# Altium PCB smart home.PcbDoc
Units mm, origin at the board's own origin, x right, y up, seen from the top; angles counter-clockwise.
Board outline 151 x 86.38 mm, 2 copper layers (Top Layer, Bottom Layer); 21 components, 12 nets, 57 pads, 0 vias.
Unrouted connection lines stored in the file: 2.
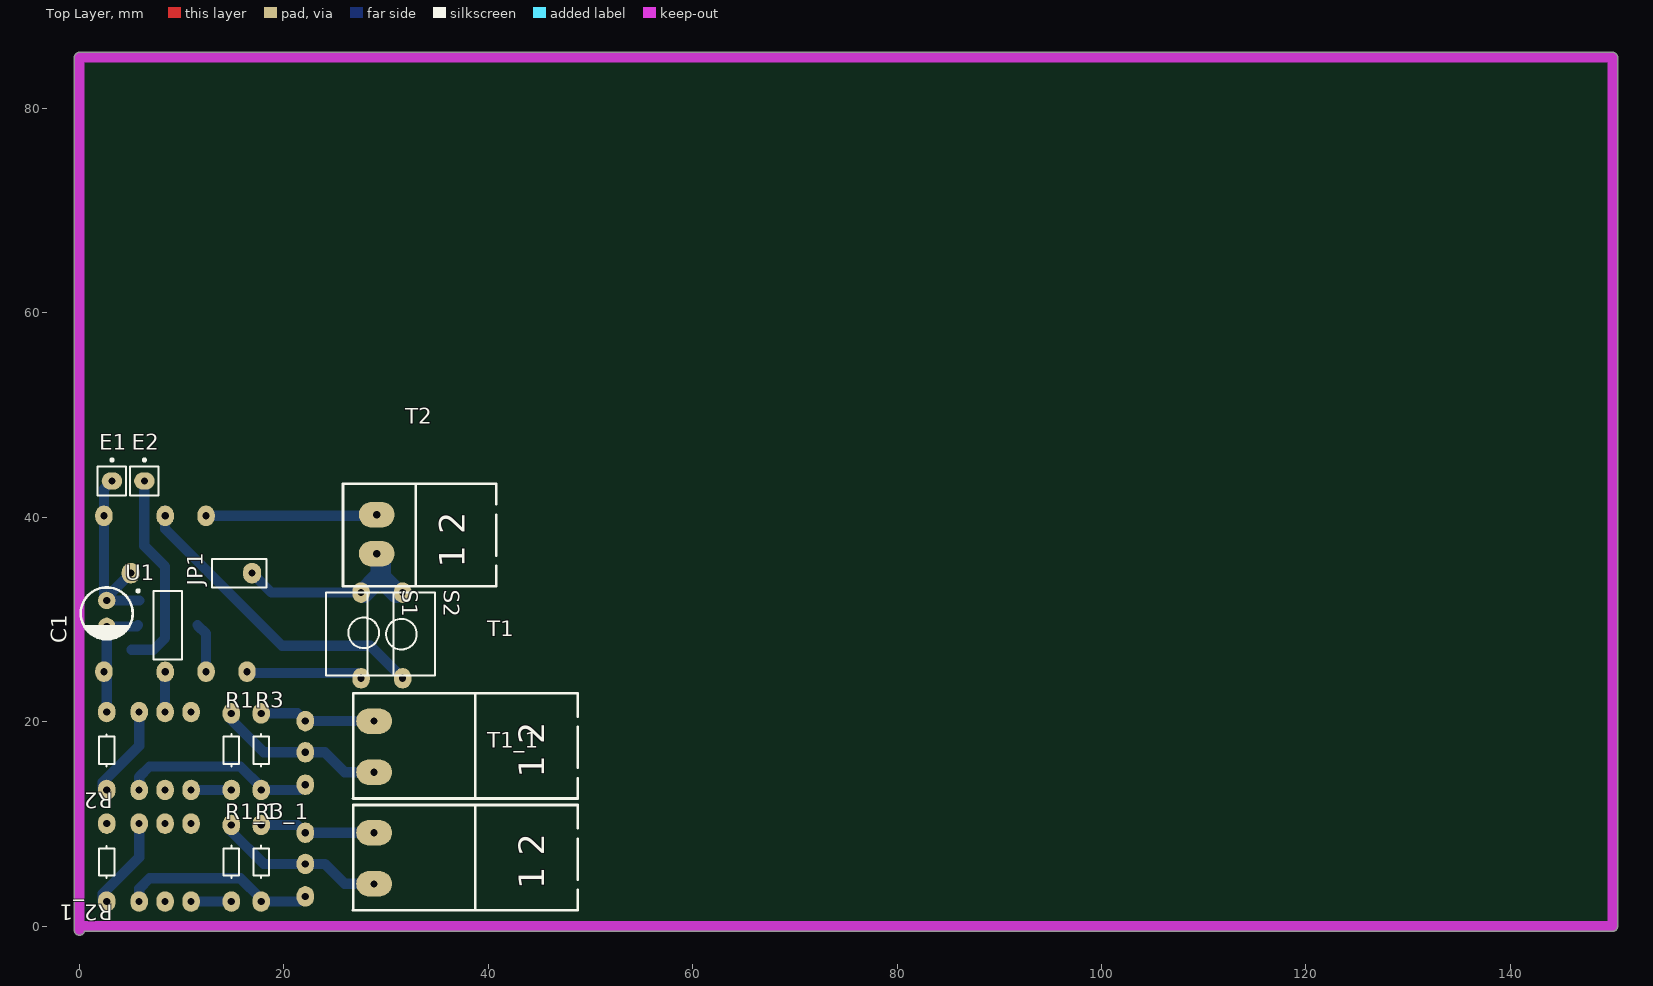
[diagram p0: Top Layer view]
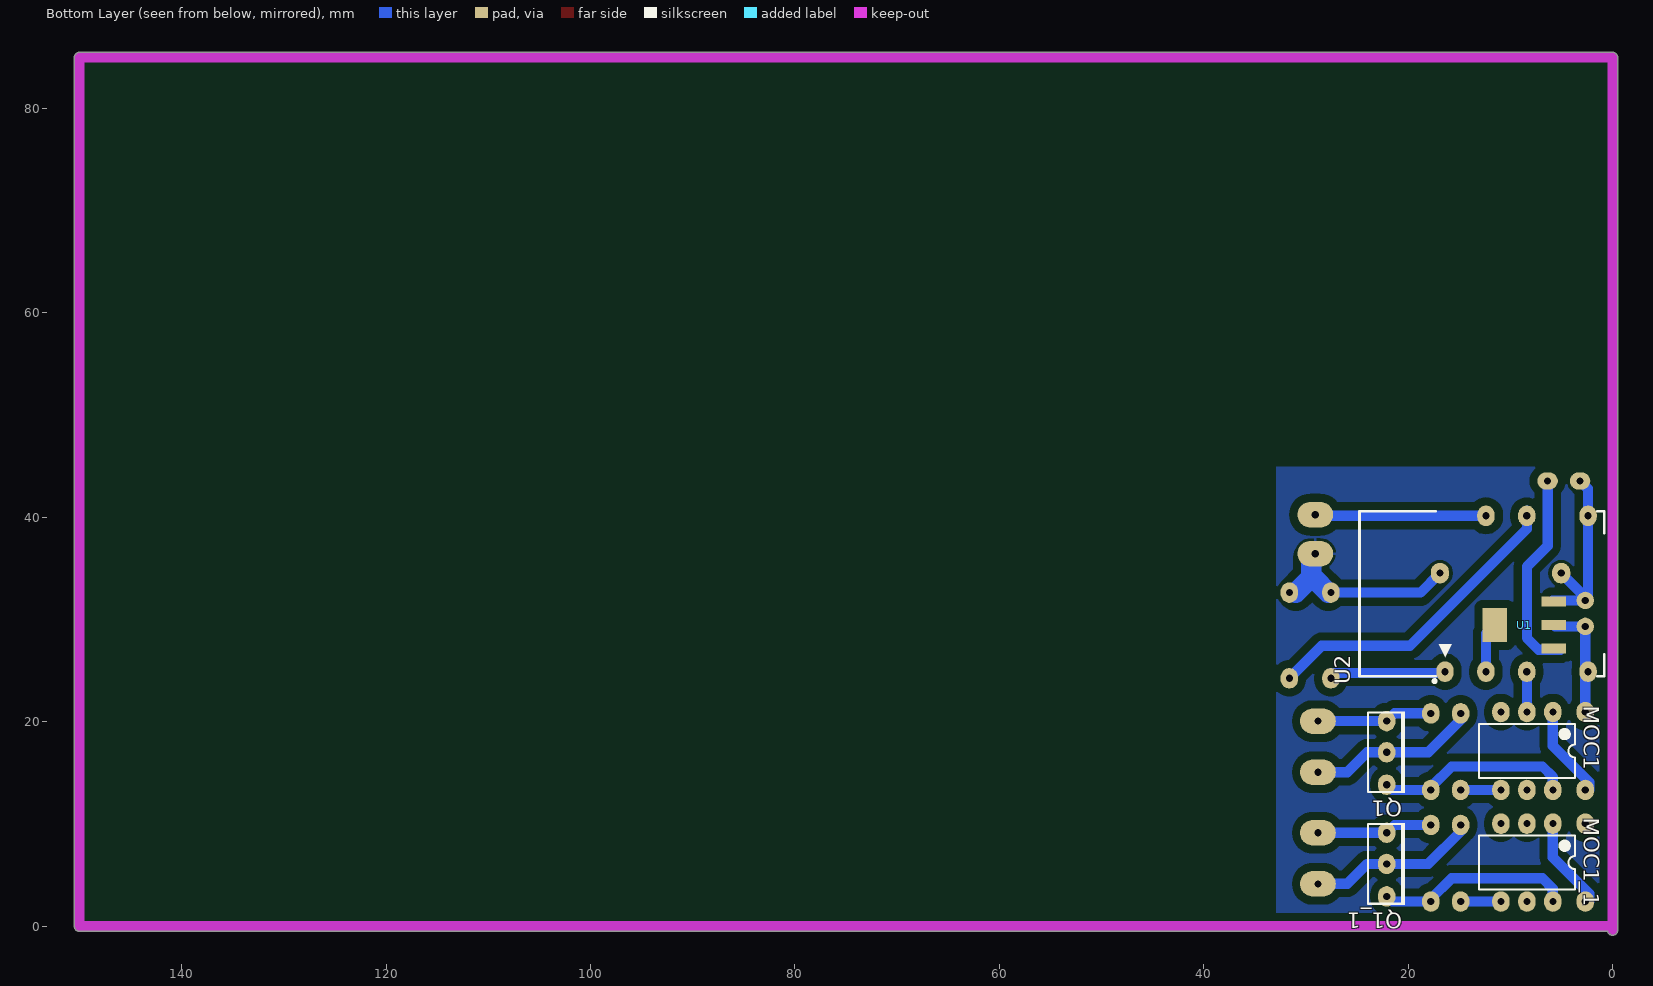
[diagram p1: Bottom Layer view, seen from below]
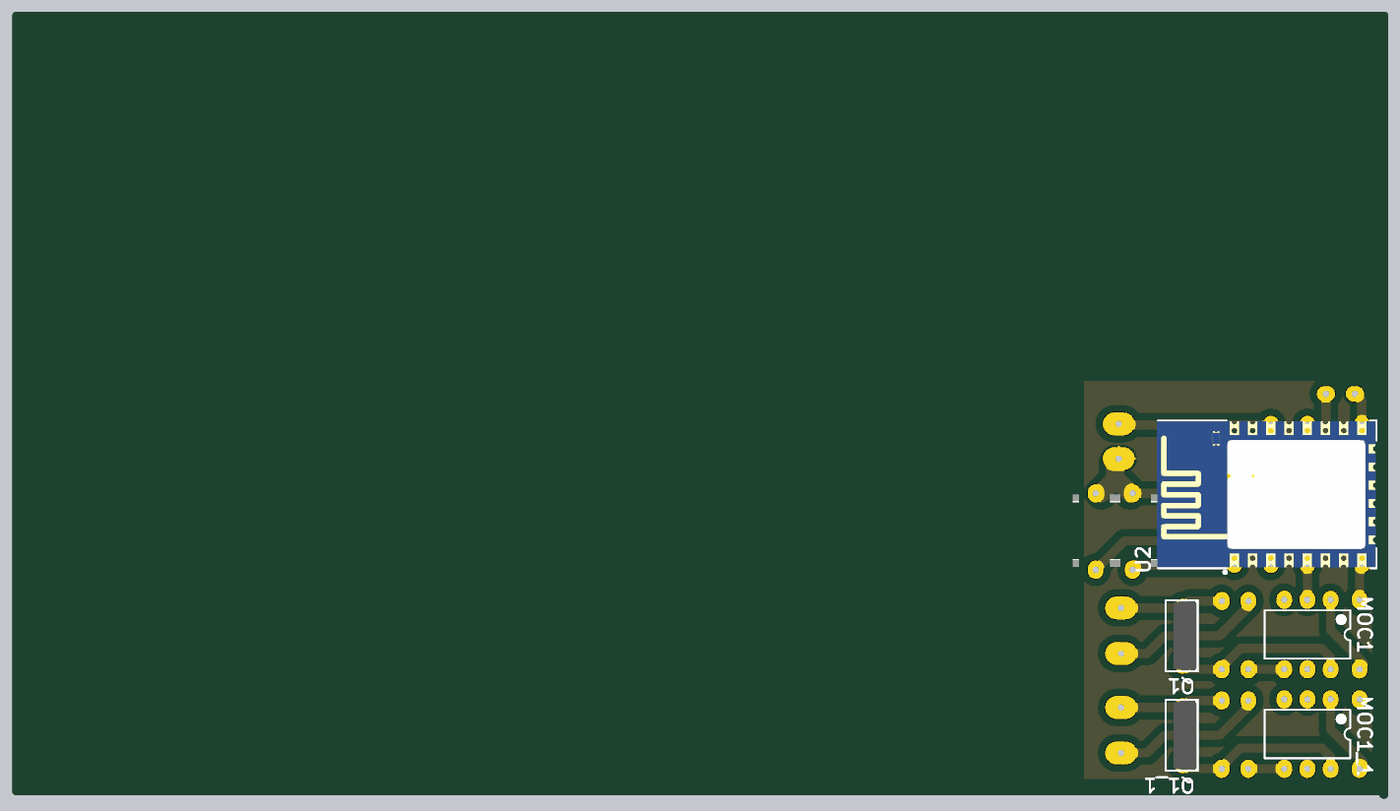
[diagram p2: 3D render of the assembled board from below, using the file's embedded part models]

## Layer stack, top to bottom
Top Solder: solder mask 0.0102, Solder Resist, Dk 3.5
Top Layer: signal copper 0.0356
Dielectric 1: dielectric 0.32, FR-4, Dk 4.8
Bottom Layer: signal copper 0.0356
Bottom Solder: solder mask 0.0102, Solder Resist, Dk 3.5

## Board outline
-0.5,-0.381 -0.5,85 cw(c0,85) 0,85.5 150,85.5 cw(c150,85) 150.5,85 150.5,0 cw(c150,0) 150,-0.5 0.486,-0.5 cw(c0,-0.381)

## Design rules (kind name [scope] priority, off if disabled: settings)
Clearance Clearance_1 [InPolygon] p1: gap=0.8 ignorepadtopadclearanceinfootprint=FALSE
Clearance [All] p2: gap=0.254 ignorepadtopadclearanceinfootprint=FALSE except(0: Arc-Hole Track-Hole SMDPad-Hole THPad-Hole Via-Hole Fill-Hole Poly-Hole Region-Hole Text-Hole)
PolygonConnect [All] p1: connectstyle=Relief reliefconductorwidth=0.254 reliefentries=4 polygonreliefangle="90 Angle" airgapwidth=0.254
RoomDefinition "smart home" [InComponentClass('smart home')] p1: confinementstyle=ConfineIn formatcopy=TRUE lockcomponents=FALSE outline 144.907,-4.953 247.904,-4.953 247.904,23.114 144.907,23.114
RoutingLayers [All] p1: top layer_v5=FALSE bottom layer_v5=TRUE
RoutingVias [All] p1: holewidth=0.711 width=2.5 viastyle="Through Hole" minholewidth=0.711 minwidth=1.27 maxholewidth=0.711 maxwidth=2
SolderMaskExpansion [All] p1: expansion=0.102 istentingtop=FALSE
Width [All] p1: maxlimit=3 minlimit=0.5 preferedwidth=1
29 further rules are at their usual default settings.

## Components (designator, comment, footprint, x,y, rotation, side; value= is the part's Value field where it differs from the comment)
C1 "Value" ELEC-CAP-RAD10-20 2.667,30.607 r90 top
E1 "Antenna" PIN1 3.175,43.561 r0 top
E2 "Antenna" PIN1 6.35,43.561 r0 top
JP1 "Jumper" "Header 2X1" 15.621,34.544 r180 top
MOC1 "MOC3021-3" DIP-6 8.382,17.145 r270 bottom
MOC1_1 "MOC3021-3" DIP-6 8.382,6.223 r270 bottom (schematic designator MOC1)
Q1 "MODEL" SOT32 22.098,17.018 r270 bottom
Q1_1 "MODEL" SOT32 22.098,6.096 r270 bottom (schematic designator Q1)
R1 "Res2" Res50#1 14.859,18.415 r90 top
R1_1 "Res2" Res50#1 14.859,7.493 r90 top (schematic designator R1)
R2 "Res2" Res50#2 2.667,16.002 r270 top
R2_1 "Res2" Res50#2 2.667,5.08 r270 top (schematic designator R2)
R3 "Res2" Res50#1 17.78,18.415 r90 top
R3_1 "Res2" Res50#1 17.78,7.493 r90 top (schematic designator R3)
S1 "PUSH BUTTON DOUBLE" "PUSH BUTTON"#1 27.432,28.575 r270 top
S2 "PUSH BUTTON DOUBLE" "PUSH BUTTON"#2 31.496,28.575 r270 top
T1 "Terminal" "phoenix terminal R 2" 48.768,12.493 r90 top
T1_1 "Terminal" "phoenix terminal R 2" 48.768,1.571 r90 top (schematic designator T1)
T2 "Phoenix terminal" "phoenix terminal 2" 40.767,33.274 r90 top
U1 "LM1117MP-3.3" MP04A_N 8.636,29.464 r0 top
U2 "ESP_12_E" ESP_12_E 16.389,24.528 r90 bottom

## Footprints (in the part's own frame and the unit in brackets; to place one, negate y for a bottom-side part, rotate by r counter-clockwise, add the part's x,y. Pads: shape width x height; smd on the part's side, far side on the other; paste and mask are expansions set on the pad)
DIP-6 [mm] "DIP; 6 Leads; Row Spacing 7.62 mm; Pitch 2.54 mm"
  oval 2x1.7 hole 0.7: 1(-3.81,2.54) 2(-3.81,0) 3(-3.81,-2.54) 4(3.81,-2.54) 5(3.81,0) 6(3.81,2.54)
  silkscreen extent -2.65,-4.7 2.65,4.7
ELEC-CAP-RAD10-20 [mm]
  round 1.7 hole 0.7: 1(-1.27,0) 2(1.27,0)
  silkscreen extent -2.54,-2.54 2.54,2.54, body extent -3.15,-3.15 3.15,3.15, height 10.26
ESP_12_E [mm] "ESP-12 Wi-Fi Module by AI-Thinker"
  oval 2x1.7 hole 0.7: 1(0.375,0) 3(0.375,-4) 5(0.364,-8) 8(0.375,-14) 15(15.625,-14) 18(15.625,-8) 22(15.625,-4)
  silkscreen extent -0.7,-15.57 16.08,8.37, body extent 0,-15.49 16,8.51, height 2.75
"Header 2X1" [mil]
  oval 70x80 hole 27.56: 1(-50,0) 2(417.32,0)
  silkscreen extent -105,-55 105,55, body extent -100,-50 100,50, height 374
MP04A_N [mm] "SOT223, 4-Leads, Body 6.5x3.5mm, Pitch 2.3mm, Lead Span 7mm, IPC Medium Density"
  rect 2.4x1 smd far side: 1(-2.9,2.3) 2(-2.9,0) 3(-2.9,-2.3)
  rect 2.4x3.3 smd far side: 4(2.9,0)
  silkscreen extent -3.02,-3.35 1.4,3.47, body extent -1.85,-3.35 1.85,3.35, height 1.8
"phoenix terminal 2" [mm] "2 terminals"
  oval 2.5x3.5 hole 0.7: 1(3.175,11.684) 2(6.985,11.684)
  silkscreen extent 0,0 10.03,15
"phoenix terminal R 2" [mm] "2 Right terminals"
  oval 2.5x3.5 hole 0.7: 1(2.573,19.939) 2(7.573,19.939)
  silkscreen extent 0,0 10.29,22
PIN1 [mm] "Generic Antenna; 1 Lead"
  oval 2x1.7 hole 0.7: 1(0,0)
  silkscreen extent -1.4,-1.4 1.4,2.17
"PUSH BUTTON"#1 [mm]
  oval 2x1.7 hole 0.7: 1(4.318,0.127) 3(-4.064,0.127)
  silkscreen extent -4.06,-3.3 4.06,3.3, body extent -3.93,-3.08 3.99,3.12, height 5.21
"PUSH BUTTON"#2 [mm]
  oval 2x1.7 hole 0.7: 1(-4.064,0.127) 3(4.318,0.127)
  silkscreen extent -4.06,-3.3 4.06,3.3, body extent -3.93,-3.08 3.99,3.12, height 5.21
Res50#1 [mm] "50mm Pin Spacing"
  oval 2x1.7 hole 0.7: 1(-5.08,0) 2(2.413,0)
  silkscreen extent -2.77,-0.76 0.38,0.76
Res50#2 [mm] "50mm Pin Spacing"
  oval 2x1.7 hole 0.7: 1(-4.953,0) 2(2.667,0)
  silkscreen extent -2.77,-0.76 0.38,0.76
SOT32 [mm] "SIP with Mounting Hole; 3 Leads; Body 10.7 x 7.6 x 2.6 mm (typ); Pitch 2.2 mm"
  oval 2x1.7 hole 0.7: 1(-3.048,0) 2(0,0) 3(3.175,0)
  silkscreen extent -4,-1.85 4,1.8, body extent -3.8,-1 3.8,1.55, height 15.19

## Part data
C1: library part "Capacitor Electrolytic", "Electrolytic Capacitor"
E1 E2: "Generic Antenna", LatestRevisionDate=17-Jul-2002, LatestRevisionNote="Re-released for DXP Platform.", PackageReference=PIN1, Published=24-Mar-1999, Publisher="Altium Limited"
MOC1 MOC1_1: "Opto-Triac", Designer="Seyed Mohsen Ghasemian", E-mail=picpars@gmail.com, LatestRevisionDate=17-11-2011, Published=17-11-2011, Publisher=www.picpars.com, WEB=www.picpars.com
Q1 Q1_1: library part BD139, "NPN Bipolar Transistor"
R1 R1_1 R2 R2_1 R3 R3_1: "Resistor", LatestRevisionDate=17-Jul-2002, LatestRevisionNote="Re-released for DXP Platform.", PackageDescription="Axial Device, Thru-Hole; 2 Leads; 0.4 in Pin Spacing", PackageReference=AXIAL-0.4, Published=8-Jun-2000, Publisher="Altium Limited"
S1 S2: "Switch"
T1 T1_1: library part "Terminal 1*2", "Terminal 2 Pin 250VAC 16A", ComponentLinkURL=www.picpars.com, Designer="Seyed Mohsen Ghasemain", E-mail=picpars@gmail.com
T2: library part "Phoenix terminal 2", "Terminal 2 Pin", ComponentLinkURL=www.picpars.com, Designer="Seyed Mohsen Ghasemain", E-mail=picpars@gmail.com
U1: "800mA Low-Dropout Linear Regulator", DigiKeyPartNumber=LM1117MP-3.3CT-ND, Manufacturer="National Semiconductor", PackageTopMarking=XYTT*N05A, PowerWise=N, Code_IPC=SOT223-4, Code_JEDEC=TO-261-AA, ComponentLink1Description="LM1117 Datasheet", ComponentLink1URL=http://www.national.com/ds/LM/LM1117.pdf, ComponentLink2Description="LM1117 Web Page", ComponentLink2URL=http://www.national.com/pf/LM/LM1117.html, ComponentLink3Description="MP04A Package Page", ComponentLink3URL=http://www.national.com/packaging/folders/mp04a.html, CompType="LDO IC", DatasheetVersion=Apr-2006, PackageDescription="Molded SOT-223, 6.50 x 3.56 x 1.6mm Body, 4 Lead, 2.3mm Pitch", PackageReference=MP04A, PackageVersion="revB, Apr-2003", PartNumber=LM1117MP-3.3, PinCount=4, Published=4-Dec-2008, Publisher="Altium Limited", RoHS=O
U2: "ESP-12 Wi-Fi Module by AI-Thinker", IC=ESP8266-EX, Vendor=Ai-thinker

## Nets (pads, with @x,y where several pads share a name; then routed paths per layer and width w, separated by ;. In a path a pad name is that pad's centre, name@x,y a point inside that pad or via, vN(x,y) a via of type N, cw(c..) or ccw(c..) an arc to the next point about the centre after c; other vN are vias at no path point)
btn: S2.3 U2.18 | length 31.1
  Bottom Layer w1: U2.18@8.382,40.64 8.382,38.862 19.812,27.432 28.448,27.432 S2.3
GND: C1.2 E1.1 JP1.1 JP1.2 S1.3 S2.1 T2.1 U1.1 U2.15 | length 38.3
  Bottom Layer w1: E1.1 2.413,42.799 2.413,32.131 C1.2 ; JP1.2 2.667,32.19 C1.2 ; U1.1@5.842,31.877 C1.2 ; JP1.1 18.796,32.639 S1.3 S1.3@27.813,32.639 ; T2.1 T2.1@29.464,36.068 ; 29.464,34.29 29.21,34.036 29.591,34.036 ; S2.1@30.988,32.639 S2.1
  Bottom Layer w2: S1.3@27.813,32.639 29.21,34.036 ; 29.464,34.29 T2.1@29.464,36.068 ; 29.591,34.036 S2.1@30.988,32.639
NetMOC1_1: MOC1.1 R2.2 | length 9.1
  Bottom Layer w1: R2.2@2.286,13.335 2.286,14.097 5.842,17.653 MOC1.1
NetMOC1_4: MOC1.4 R1.1 | length 4.1
  Bottom Layer w1: MOC1.4 R1.1 R1.1@14.986,13.335
NetMOC1_6: MOC1.6 Q1.3 R3.1 | length 19.3
  Bottom Layer w1: MOC1.6 5.842,14.605 6.858,15.621 15.748,15.621 17.78,13.589 R3.1 21.59,13.335 Q1.3
NetQ1_1: Q1.1 R3.2 T1.2 | length 11.4
  Bottom Layer w1: R3.2 21.336,20.828 Q1.1 T1.2
NetQ1_2: Q1.2 R1.2 T1.1 | length 16.7
  Bottom Layer w1: R1.2 14.859,20.193 18.034,17.018 Q1.2 24.003,17.018 25.955,15.066 T1.1
out: MOC1.2 U2.5 | length 3.9
  Bottom Layer w1: MOC1.2 U2.5@8.382,24.892
rst: S1.1 U2.1 | length 11.5
  Top Layer w0.7: U2.1 U2.1@16.648,24.903
  Bottom Layer w1: U2.1@16.648,24.903 16.51,24.765 S1.1@27.559,24.765
s: T2.2 U2.22 | length 16.7
  Bottom Layer w1: U2.22 28.977,40.153 T2.2
vDD: E2.1 U1.3 | length 20
  Bottom Layer w1: U1.3@5.08,27.051 7.239,27.051 8.382,28.194 8.382,35.179 6.35,37.211 E2.1
vesp: C1.1 R2.1 U1.2 U1.4 U2.3 U2.8 | length 16.4
  Bottom Layer w1: R2.1 C1.1 5.609,29.337 U1.2 ; U1.4 12.389,28.611 U2.3
pads on no net: MOC1.3 MOC1.5 MOC1_1.1 MOC1_1.2 MOC1_1.3 MOC1_1.4 MOC1_1.5 MOC1_1.6 Q1_1.1 Q1_1.2 Q1_1.3 R1_1.1 R1_1.2 R2_1.1 R2_1.2 R3_1.1 R3_1.2 T1_1.1 T1_1.2
copper on no net: | length 60.5
  Bottom Layer w1: 2.286,2.413 2.286,3.175 5.842,6.731 5.842,10.033 ; 5.842,2.413 5.842,3.683 6.858,4.699 15.748,4.699 17.78,2.667 17.78,2.413 21.59,2.413 22.098,2.921 ; 10.922,2.413 14.859,2.413 14.986,2.413 ; 14.859,9.906 14.859,9.271 18.034,6.096 22.098,6.096 24.003,6.096 25.955,4.144 28.829,4.144 ; 17.78,9.906 21.336,9.906 22.098,9.144 28.829,9.144

## Polygon pours and split planes (outlines as drawn)
GND on Bottom Layer "Bottom Layer-No Net" (solid, pour order 2): 0.127,0 0.127,45.339 0.508,44.958 32.893,44.958 32.893,0

## Keep-outs
Keep-Out Layer:
  lines w1: 0,-0.381 0,85 150,85 150,0 0,0

## Text inside footprints (layer, text, board x,y; h text height)
T1: Top Overlay "1 2" at 45.466,14.525 h2.5 r90
T1_1: Top Overlay "1 2" at 45.466,3.603 h2.5 r90
T2: Top Overlay "1 2" at 37.719,35.052 h2.5 r90
U2: Mechanical 13 "CUTOUT POLYGON" at 23.755,24.655 h0.25 r270; Mechanical 13 "ANTENNA AREA" at 24.263,24.655 h0.25 r270